# Altium PCB Clock PCB.PcbDoc
Units mm, origin at the board's own origin, x right, y up, seen from the top; angles counter-clockwise.
Board outline 80 x 80 mm, 2 copper layers (Top Layer, Bottom Layer); 36 components, 38 nets, 132 pads, 2 vias.
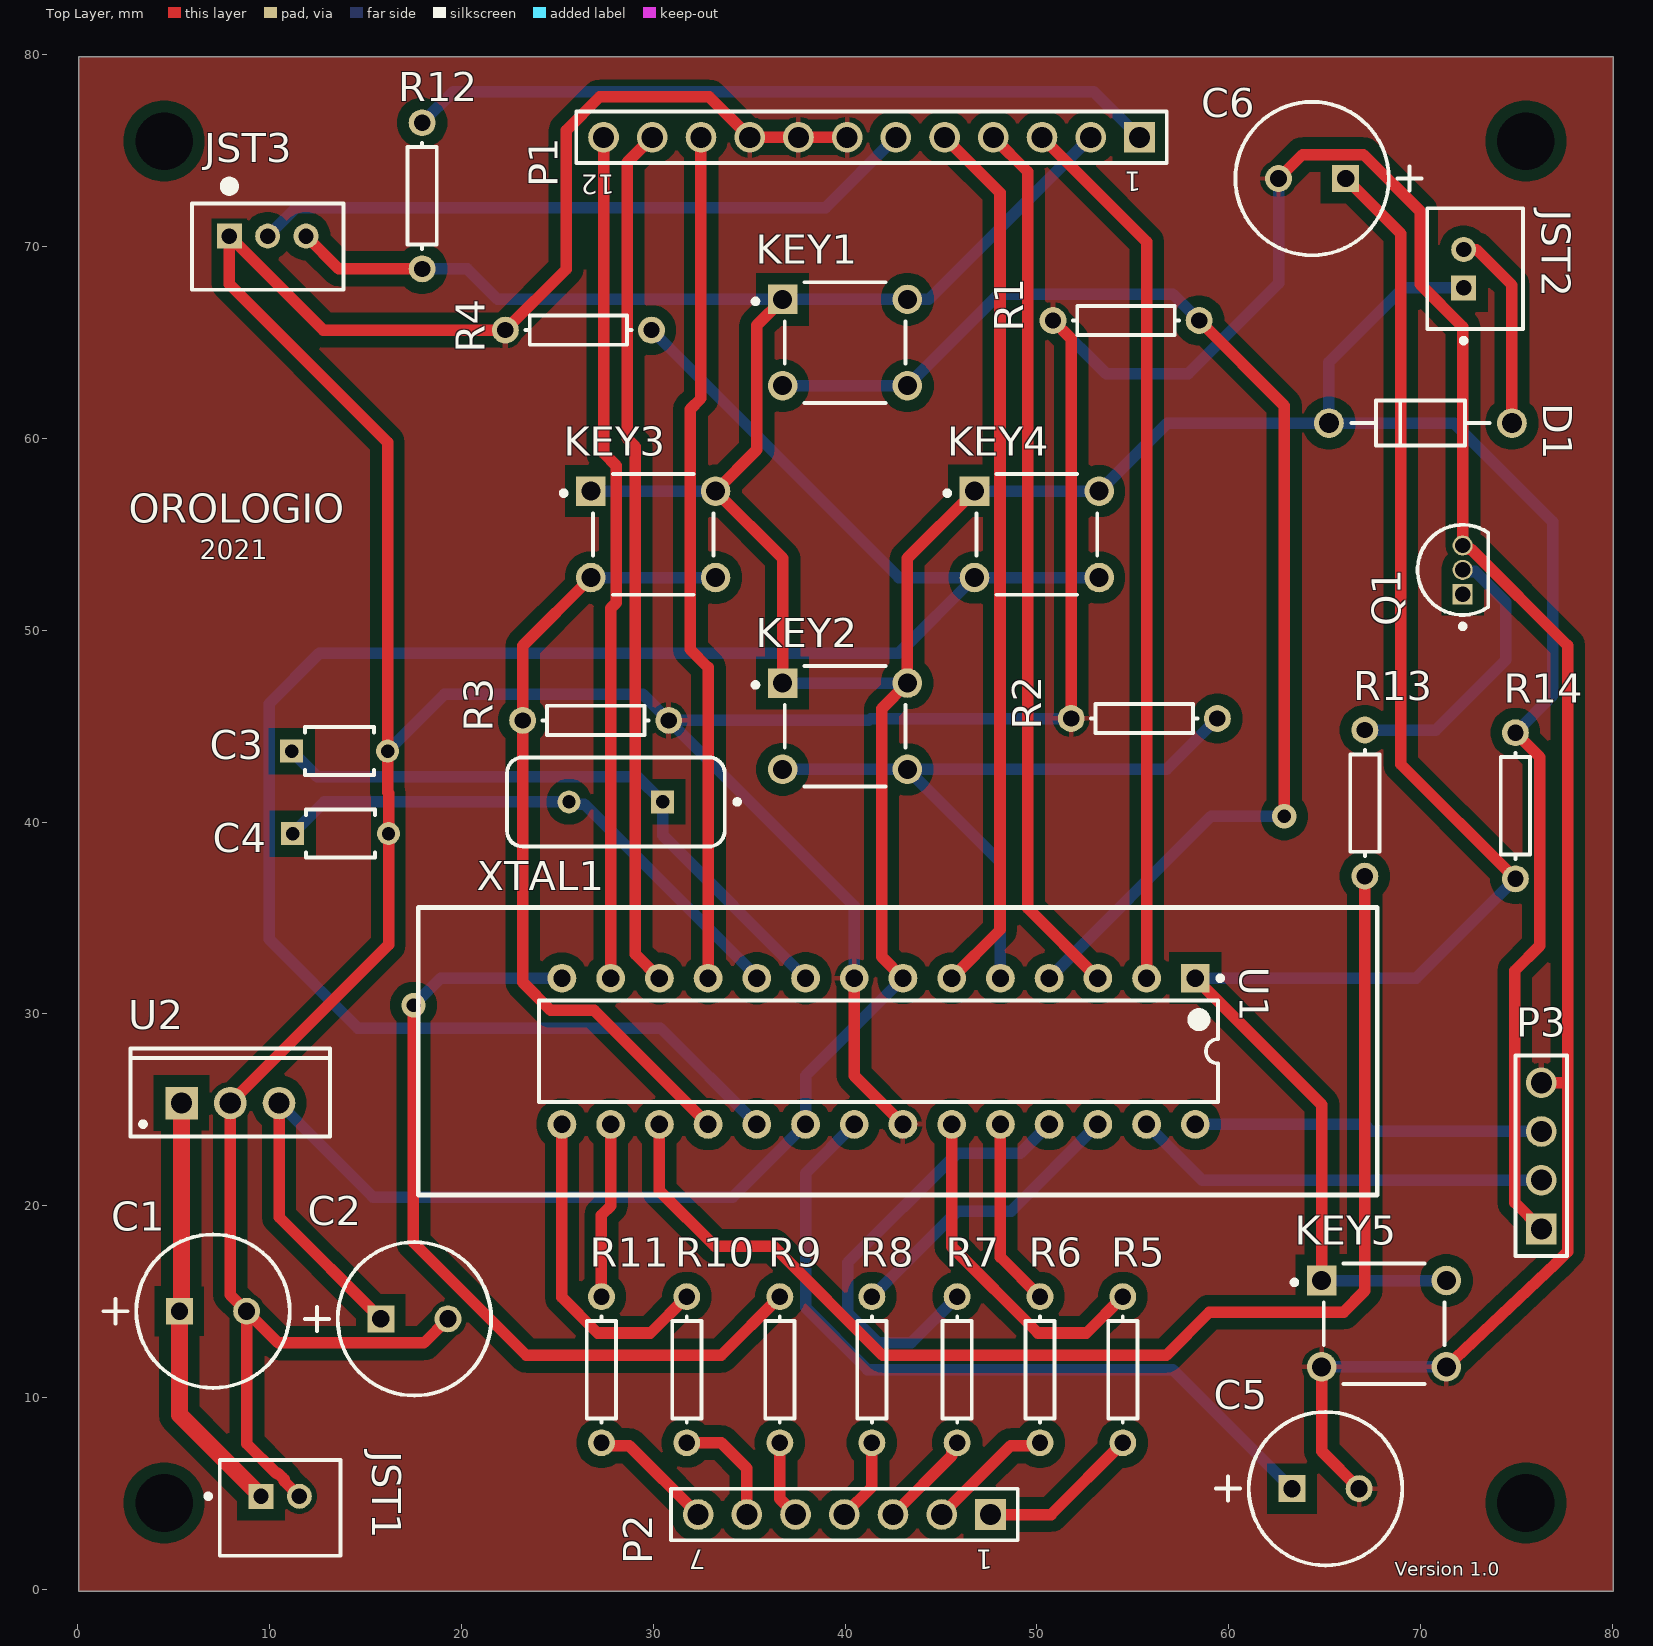
[diagram p0: Top Layer view]
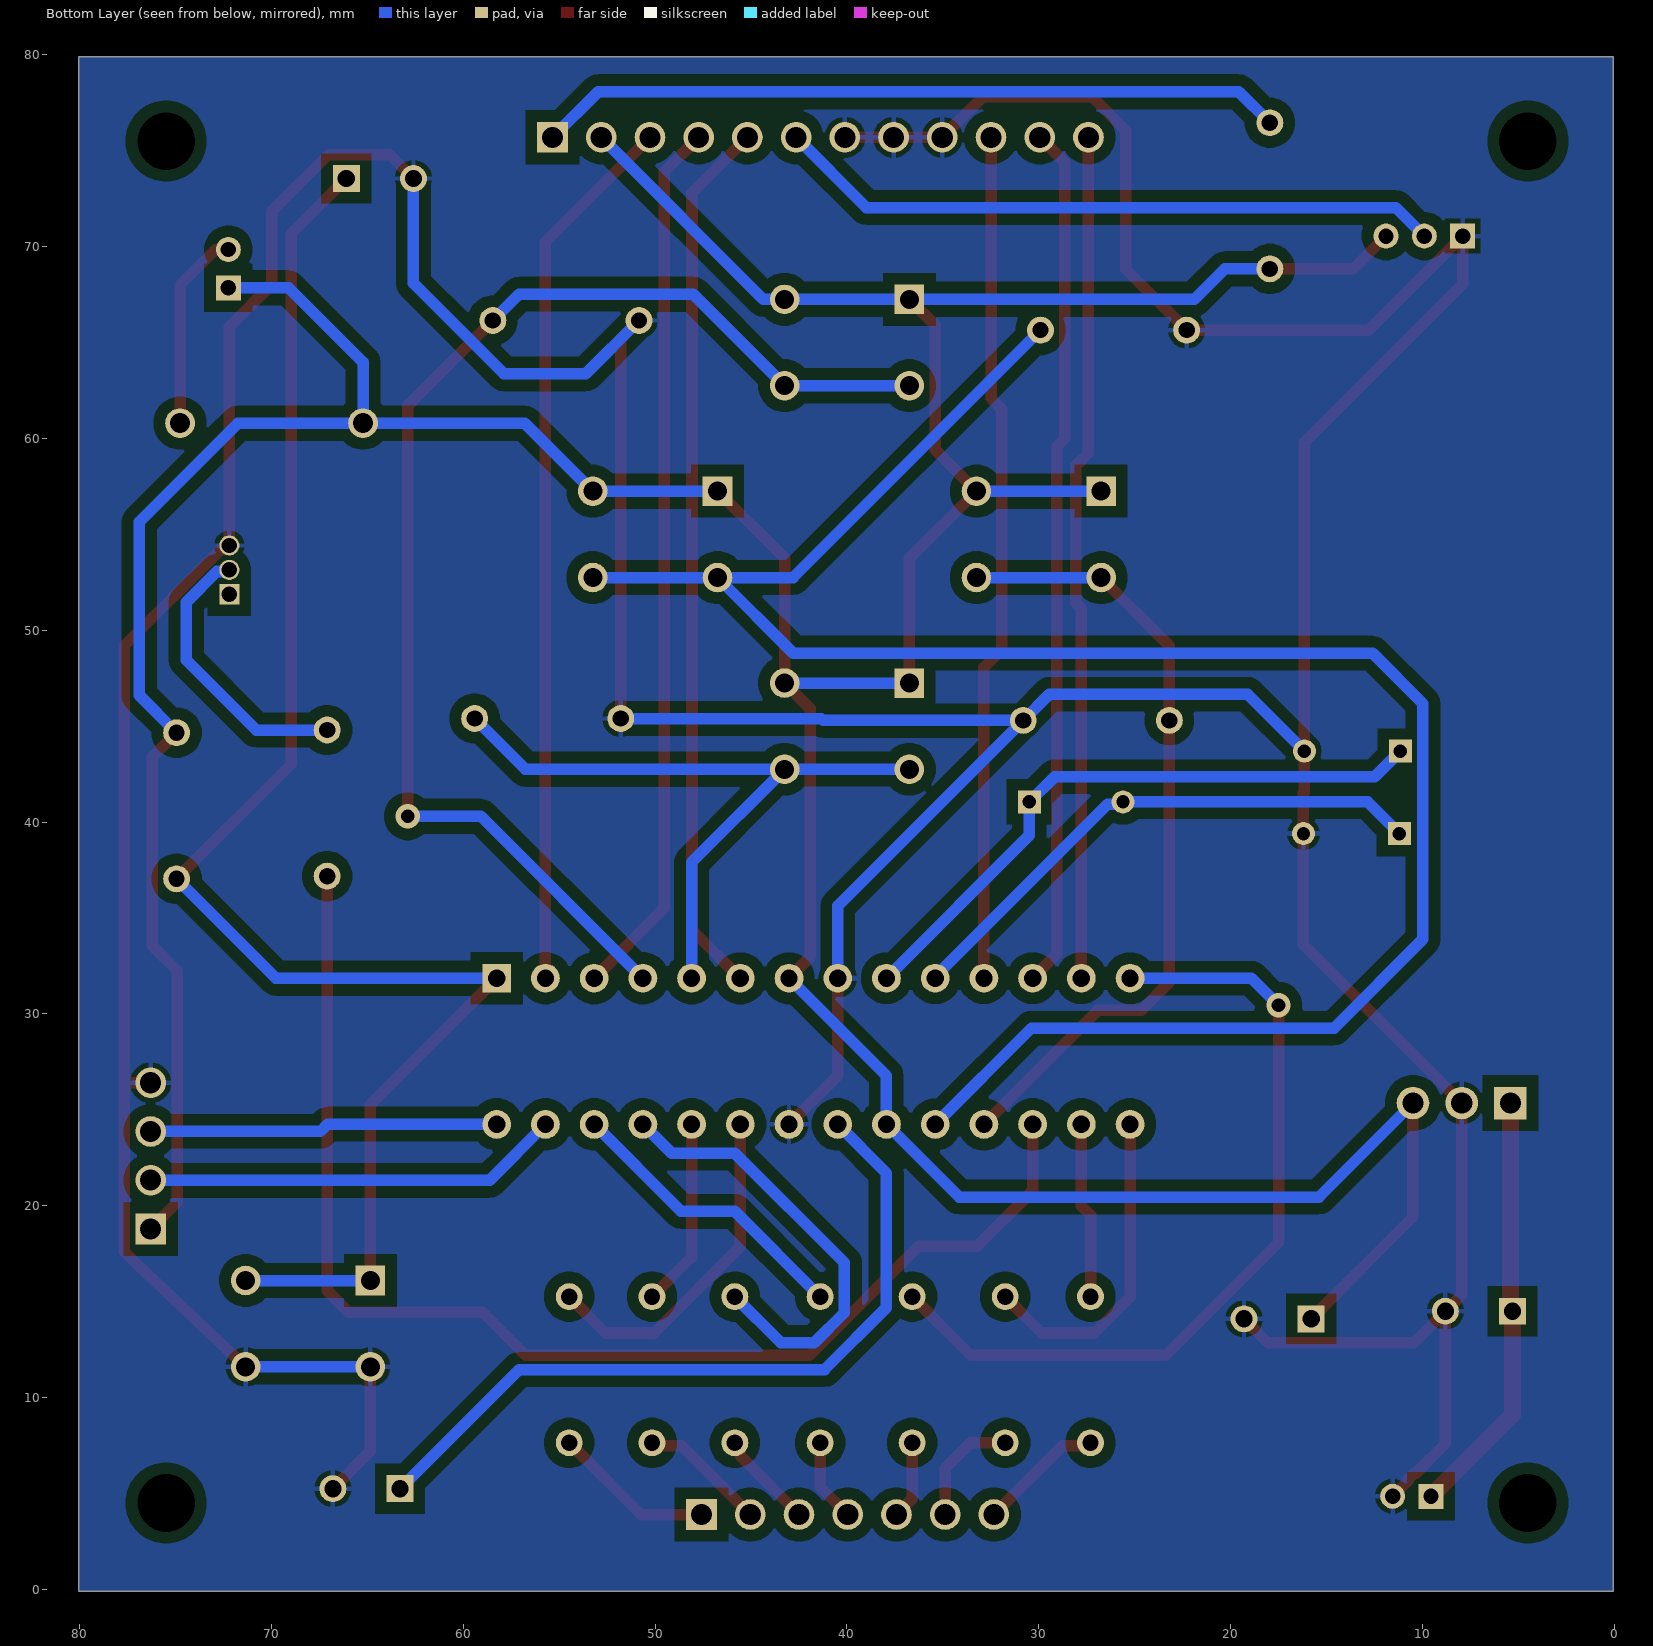
[diagram p1: Bottom Layer view, seen from below]
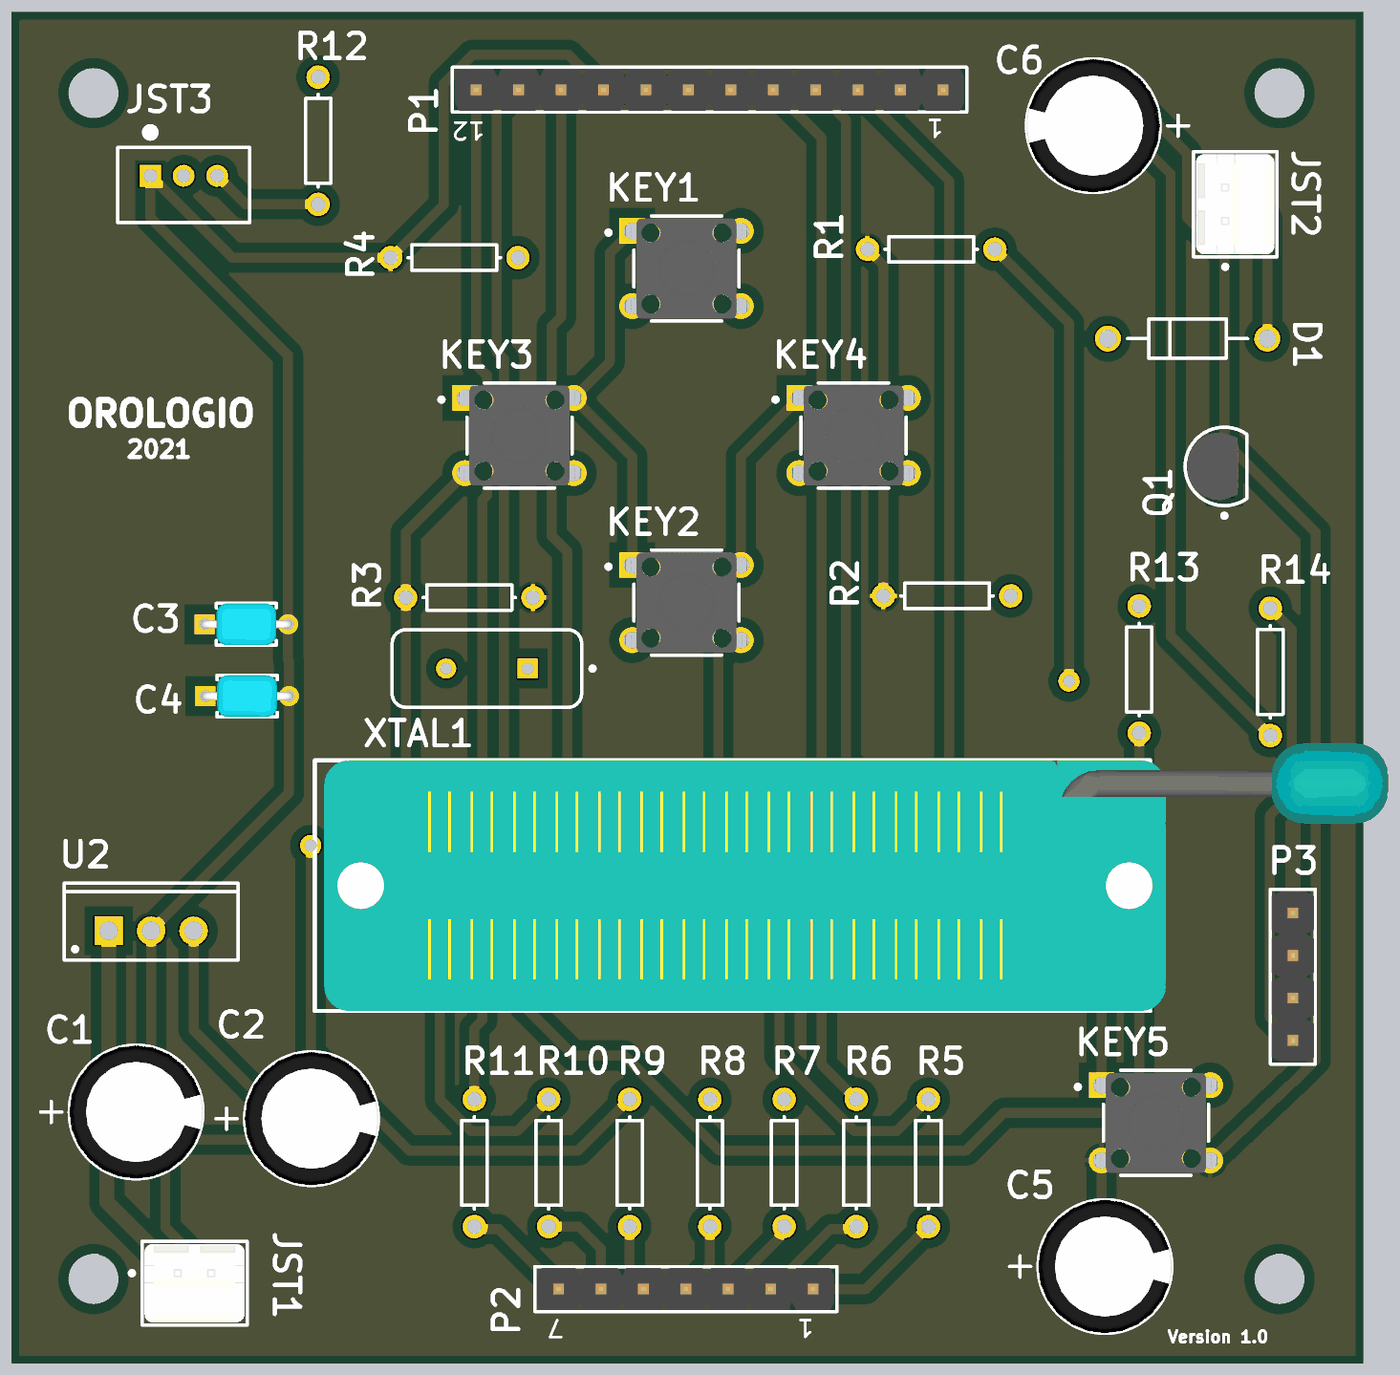
[diagram p2: 3D render of the assembled board from above, using the file's embedded part models]

## Layer stack, top to bottom
Top Solder: solder mask 0.0102, Solder Resist, Dk 3.5
Top Layer: signal copper 0.0356
Dielectric 1: dielectric 0.32, FR-4, Dk 4.8
Bottom Layer: signal copper 0.0356
Bottom Solder: solder mask 0.0102, Solder Resist, Dk 3.5

## Board outline
0.05,-0.1 80.05,-0.1 80.05,79.9 0.05,79.9

## Design rules (kind name [scope] priority, off if disabled: settings)
Clearance [All] p1: gap=0.6 ignorepadtopadclearanceinfootprint=FALSE except(0: Arc-Hole Track-Hole SMDPad-Hole THPad-Hole Via-Hole Fill-Hole Poly-Hole Region-Hole Text-Hole; 0.254: Arc-SMDPad Arc-THPad Arc-Via Arc-Text Track-SMDPad Track-THPad Track-Via Track-Text SMDPad-SMDPad SMDPad-THPad SMDPad-Via SMDPad-Text THPad-THPad THPad-Via THPad-Text Via-Via Via-Text Fill-Text Poly-Text Region-Text Text-Text; 0.4: Arc-Arc Arc-Track Track-Track)
HoleSize [All] p1: absolutevalues=TRUE maxlimit=4.5 minlimit=0.025 maxpercent=80.000 minpercent=20.000
PolygonConnect [All] p1: connectstyle=Relief reliefconductorwidth=0.254 reliefentries=4 polygonreliefangle="90 Angle" airgapwidth=0.254
RoutingVias [All] p1: holewidth=0.711 width=1.27 viastyle="Through Hole" minholewidth=0.711 minwidth=1.27 maxholewidth=0.711 maxwidth=1.27
SilkToSolderMaskClearance [IsPad] p1: minsilkscreentomaskgap=0.2 clearancetoexposedcopper=TRUE
SolderMaskExpansion [All] p1: expansion=0.102 istentingtop=FALSE
Width [All] p1: maxlimit=1 minlimit=0.254 preferedwidth=0.6
28 further rules are at their usual default settings.

## Components (designator, comment, footprint, x,y, rotation, side; value= is the part's Value field where it differs from the comment)
C1 "330nF" CAPPR65-350-1150X800X1250 7.05,14.5 r0 top
C2 "100nF" CAPPR65-350-1150X800X1250 17.55,14.1 r0 top
C3 "22pF" FP-RCE0K1-MFG 13.65,43.7 r0 top
C4 "22pF" FP-RCE0K1-MFG 13.7,39.4 r0 top
C5 "100nF" CAPPR65-350-1150X800X1250 65.05,5.25 r0 top
C6 "100nF" CAPPR65-350-1150X800X1250 64.35,73.55 r180 top
D1 "1N4001" ONSC-AXIAL_LEAD-2-59-10_P 70,60.8 r0 top
JST1 "Power" FP-440054-2-MFG 10.55,4.25 r180 top
JST2 "Buzzer" FP-440054-2-MFG 72.85,68.85 r270 top
JST3 "Potentiometer" JST-B3B-PH-K-S-3_V 9.9,70 r0 top
KEY1 "UP_BTN" FP-1825910-2-0 40,65 r0 top
KEY2 "DOWN_BTN" FP-1825910-2-0 40,45 r0 top
KEY3 "SELECT_BTN" FP-1825910-2-0 30,55 r0 top
KEY4 "BACK_BTN" FP-1825910-2-0 50,55 r0 top
KEY5 "RST_BTN" FP-1825910-2-0 68.1,13.85 r0 top
P1 "LCD Connector" 61301211121 41.38,75.7 r180 top
P2 "Keypad" 61300711121 39.96,3.9 r180 top
P3 "RTC Module" 61300411121 76.3,22.6 r90 top
Q1 "BC547B" ONSC-TO-92-3-29-11 72.2,53.15 r90 top
R1 "1K" AXIAL-0.3 54.65,66.15 r180 top
R2 "1K" AXIAL-0.3 55.6,45.4 r180 top
R3 "1K" AXIAL-0.3 27,45.3 r180 top
R4 "1K" AXIAL-0.3 26.1,65.65 r0 top
R5 "1K" AXIAL-0.3 54.482,11.45 r90 top
R6 "1K" AXIAL-0.3 50.164,11.45 r90 top
R7 "1K" AXIAL-0.3 45.846,11.45 r90 top
R8 "1K" AXIAL-0.3 41.4,11.45 r90 top
R9 "470R" AXIAL-0.3 36.6,11.45 r90 top
R10 "470R" AXIAL-0.3 31.75,11.45 r90 top
R11 "470R" AXIAL-0.3 27.3,11.45 r90 top
R12 "220R" AXIAL-0.3 17.95,72.65 r90 top
R13 "220R" AXIAL-0.3 67.1,40.99 r90 top
R14 "10K" AXIAL-0.3 74.95,40.85 r90 top
U1 "ATmega328P-PU" 28P3 41.75,28.05 r270 top
U2 "L7805ACV" TO220 7.95,25.35 r0 top
XTAL1 "16MHz" FOX-FOXSLF160-20 28.05,41.05 r180 top

## Footprints (in the part's own frame and the unit in brackets; to place one, negate y for a bottom-side part, rotate by r counter-clockwise, add the part's x,y. Pads: shape width x height; smd on the part's side, far side on the other; paste and mask are expansions set on the pad)
28P3 [mm] "28-Pin Plastic Dual In-Line Package (PDIP)"
  rect 1.5x1.5 hole 0.9: 1(-3.81,16.51)
  round 1.5 hole 0.9: 2(-3.81,13.97) 3(-3.81,11.43) 4(-3.81,8.89) 5(-3.81,6.35) 6(-3.81,3.81) 7(-3.81,1.27) 8(-3.81,-1.27) 9(-3.81,-3.81) 10(-3.81,-6.35) 11(-3.81,-8.89) 12(-3.81,-11.43) 13(-3.81,-13.97) 14(-3.81,-16.51) 15(3.81,-16.51) 16(3.81,-13.97) 17(3.81,-11.43) 18(3.81,-8.89) 19(3.81,-6.35) 20(3.81,-3.81) 21(3.81,-1.27) 22(3.81,1.27) 23(3.81,3.81) 24(3.81,6.35) 25(3.81,8.89) 26(3.81,11.43) 27(3.81,13.97) 28(3.81,16.51)
  silkscreen extent -3.93,-17.7 2.65,17.94, body extent -8.52,-23.45 7.51,40.25, height 11.45
61300411121 [mm] "Pin Header, pitch 2.54 mm, THT, Vertical, single row, 4p"
  rect 1.6x1.6 hole 1.1: 1(-3.81,0)
  round 1.6 hole 1.1: 2(-1.27,0) 3(1.27,0) 4(3.81,0)
  silkscreen extent -5.23,-1.35 5.23,1.35, body extent -5.08,-1.27 5.08,1.27, height 8.57
61300711121 [mm] "Pin Header, pitch 2.54 mm, THT, Vertical, single row, 7p"
  rect 1.6x1.6 hole 1.1: 1(-7.62,0)
  round 1.6 hole 1.1: 2(-5.08,0) 3(-2.54,0) 4(0,0) 5(2.54,0) 6(5.08,0) 7(7.62,0)
  silkscreen extent -9.04,-1.35 9.04,1.35, body extent -8.89,-1.27 8.89,1.27, height 8.57
61301211121 [mm] "Pin Header, pitch 2.54 mm, THT, Vertical, single row, 12p"
  rect 1.6x1.6 hole 1.1: 1(-13.97,0)
  round 1.6 hole 1.1: 2(-11.43,0) 3(-8.89,0) 4(-6.35,0) 5(-3.81,0) 6(-1.27,0) 7(1.27,0) 8(3.81,0) 9(6.35,0) 10(8.89,0) 11(11.43,0) 12(13.97,0)
  silkscreen extent -15.39,-1.35 15.39,1.35, body extent -15.24,-1.27 15.24,1.27, height 8.57
AXIAL-0.3 [mm] "Axial Device, Thru-Hole; 2 Leads; 0.3 in Pin Spacing"
  round 1.4 hole 0.85: 1(-3.81,0) 2(3.81,0)
  silkscreen extent -2.77,-0.76 2.77,0.76
CAPPR65-350-1150X800X1250 [mm] "THD, 2-Leads, Dia 8mm, Body 11.5mm"
  rect 1.4x1.4 hole 0.9: 1(-1.75,0)
  round 1.4 hole 0.9: 2(1.75,0)
  silkscreen extent -5.71,-4 4,4, body extent -4,-4 4,4, height 11.5
FOX-FOXSLF160-20 [mm] "THD, 2-Leads, Body 11.35x4.65mm"
  rect 1.2x1.2 hole 0.7: 1(-2.44,0)
  round 1.2 hole 0.7: 2(2.44,0)
  silkscreen extent -6.45,-2.32 5.68,2.33, body extent -5.67,-2.32 5.68,2.33, height 3.6
FP-440054-2-MFG [mm]
  rect 1.3x1.3 hole 0.8 paste-1000 mask+0: 1(1,-0.6)
  round 1.3 hole 0.8 paste-1000 mask+0: 2(-1,-0.6)
  silkscreen extent -3.15,-2.5 3.87,2.5, body extent -3.25,-2.6 3.25,2.6, height 0.25
FP-1825910-2-0 [mm]
  rect 1.54x1.54 hole 0.99 paste-1000 mask+0: 1(-3.25,2.25)
  round 1.54 hole 0.99 paste-1000 mask+0: 2(3.25,2.25) 3(-3.25,-2.25) 4(3.25,-2.25)
  silkscreen extent -4.79,-3.15 3.15,3.15, body extent -4.12,-3.24 4.12,3.24, height 0.25
FP-RCE0K1-MFG [mm]
  rect 1.2x1.2 hole 0.7 paste-1000 mask+0: 1(-2.5,0)
  round 1.2 hole 0.7 paste-1000 mask+0: 2(2.5,0)
  silkscreen extent -1.8,-1.25 1.8,1.25, body extent -3.2,-1.35 3.2,1.35, height 0.25
JST-B3B-PH-K-S-3_V [mm] "Connector, 3-Leads, Body 7.9x4.5mm, Pitch 2mm"
  rect 1.3x1.3 hole 0.8: 1(-2,0.55)
  round 1.3 hole 0.8: 2(0,0.55) 3(2,0.55)
  silkscreen extent -3.95,-2.25 3.95,3.4, body extent -3.95,-2.25 3.95,2.25, height 6
ONSC-AXIAL_LEAD-2-59-10_P [mm] "AXIAL, 2-Leads, Diameter 2.35mm"
  round 1.55 hole 1.05: 1(-4.77,0) 2(4.77,0)
  silkscreen extent -3.59,-1.18 3.59,1.17
ONSC-TO-92-3-29-11 [mm] "TO, 3-Leads, Body Dia 4.7mm, Pitch 1.27mm"
  rect 1.05x1.05 hole 0.8: 1(-1.27,0)
  round 1.05 hole 0.8: 2(0,0) 3(1.27,0)
  silkscreen extent -3.07,-1.34 2.35,2.35, body extent -2.04,-0.81 2.04,2.24, height 7
TO220 [mm] "TO, Thru-Hole, Vertical, Heatsink Mounted; 3 In-Line Leads; Pitch 2.54 mm"
  rect 1.7x1.7 hole 1.1: 1(-2.54,0)
  round 1.7 hole 1.1: 2(0,0) 3(2.54,0)
  silkscreen extent -5.2,-1.75 5.2,2.85, body extent -5.25,-1.8 5.25,2.9, height 19.7

## Part data
C1 C2 C5 C6: library part CMP-1665-00042-2, "Aluminum Electrolytic Capacitor, 100 uF, +/- 20%, 50 V, -40 to 85 degC, 2-Pin THD, RoHS, Bulk", Capacitance=100uF, Case/Package=Radial, Dielectric Material=Aluminium, Leakage Current=3uA, Manufacturer=Panasonic, Max Operating Temperature=85degC, Min Operating Temperature=-40degC, Package Description="2-Pin Radial Lead, Dia 8 mm, Height 12.5 mm", Package Quantity=200, Package Reference=CAPPR65-350-1150X800X1250, Ripple Current=250mA, Tolerance=20%, Voltage=50V, Datasheet URL=https://industrial.panasonic.com/cdbs/www-data/pdf/RDF0000/ABA0000C1218.pdf, Datasheet Version="Rev. 05, 10/2016", Diameter=8mm, Dissipation Factor=0.12%, Height=11.5mm, Height - Seated (Max)=0.492inch, Lead Diameter=0.6mm, Lead Free=LeadFree, Lead Pitch=3.5mm, Lead/Base Style=Straight, Length=11.5mm, Life (Hours)=2000Hour, Manufacturer URL=http://www.panasonic.com/, Mount=ThroughHole, Number of Pins=2, Packaging=Bulk, Polarity=Polar, Radiation Hardening=No, REACH SVHC=NoSVHC, Ripple Current (AC)=250mA, RoHSCompliant=true, Termination=Radial, Voltage Rating=50V, Voltage Rating (DC)=50V
C3 C4: library part CMP-06035-004895-1, "Cap Ceramic 22pF 50V C0G ±5% Radial 5mm +125°C Automotive Bulk", Case/Package=Radial, Dielectric=C0G, Max Operating Temperature=125°C, Min Operating Temperature=-55°C, Package Quantity=2000, Ratings=AEC-Q200, Resistor Type=Ceramic, Tolerance=5%, Voltage Rating=50V, Capacitance=22pF, Height=3.5mm, Height - Seated (Max)=0.138inch, Lead Diameter=0.5mm, Lead Pitch=0.197inch, Lead/Base Style="Formed Leads", Length=0.142inch, Mount="Through Hole", Packaging="Tape and Reel", Termination=Radial, Voltage Rating (DC)=50V, Width=0.098inch
D1: library part CMP-0902-00117-1, "Standard Recovery Rectifier, 2-Pin Axial_Lead, Pb-Free, Bulk Bag", Manufacturer="On Semiconductor", ComponentLink1Description="Manufacturer URL", ComponentLink1URL=http://www.onsemi.com/, ComponentLink2Description=Datasheet, ComponentLink2URL=http://www.onsemi.com/pub_link/Collateral/1N4001-D.PDF, ComponentLink3Description="Package Specification", ComponentLink3URL=http://www.onsemi.cn/pub_link/Collateral/59-10.PDF, DatasheetVersion="Rev. 13", IFSM Max (A)=30, IO(rec) Max (A)=1, Mounting Technology="Through Hole", PackageDescription="2-Pin, Axial Lead, Diameter 2.35 mm", PackageReference=AXIAL_LEAD-2-59-10, PackageVersion="Rev. U, 02/2005", Packing="Bulk Bag", PartNumber=1N4001, RoHS=TRUE, Type="Standard Recovery", VRRM Max (V)=50
JST1 JST2: library part CMP-03369-000005-1, "CONN HEADER VERT 2POS 2MM", Current Rating=3A, Manufacturer="TE Connectivity", Manufacturer Part Number=440054-2, Temperature="-25°C to +85°C", Temperature Range High=+85°C, Temperature Range Low=-25°C, Voltage Rating=250V, Automotive=No, Category=Conn, ComponentLink2Description=Datasheet, ComponentLink2URL=https://www.te.com/usa-en/product-440054-2.datasheet.pdf, Conn Gender=Male, Conn Orientation=Vertical, Contact Material=Tin,Nickel, Device Class L1=Connectors, Device Class L2="Headers and Wire Housings", Device Class L3=unset, Digikey Description="CONN HEADER VERT 2POS 2MM", Footprint Url=https://www.te.com/commerce/DocumentDelivery/DDEController?Action=showdoc&DocId=Customer+Drawing%7F440054%7FF6%7Fpdf%7FEnglish%7FENG_CD_440054_F6.pdf%7F440054-2, Height=6.35mm, Lead Free=Yes, Mouser Description="Headers & Wire Housings 2.0mm HDR 2pos VERT HPI", Number Of Contacts=2, Number Of Rows=1, Octopart=https://octopart.com/440054-2-te+connectivity-40237927, Package=440054-2, Pitch=2mm, RoHS=TRUE
JST3: library part CMP-2000-05164-1, "Male Header, Pitch 2 mm, 1 x 3 Position, Height 6 mm, Tail Length 3.4 mm, -25 to 85 degC, RoHS, Bulk", Manufacturer=JST, Datasheet URL=https://datasheet.ciiva.com/11746/0900766b80826550-11746939.pdf, Datasheet Version=Oct-06, Manufacturer URL=http://www.jst.com/home2.html, No of Positions=3, Pitch=2mm, Style/Orientation=StraightHeader/Plug, Termination=Crimp, Type=ShroudedHeader
KEY1 KEY2 KEY3 KEY4 KEY5: library part CMP-03407-000004-1, "SWITCH TACTILE SPST-NO 0.05A 24V", Contact Current Rating=50mA, Contact Resistance=100mΩ, Manufacturer=TE, Manufacturer Part Number=1825910-2, Operating Force=160gf, Package=0, Temperature="-35°C to +85°C", Temperature Range High=+85°C, Temperature Range Low=-35°C, Voltage Rating Dc=24V, Automotive=No, Category=Switch, ComponentLink2Description=Datasheet, ComponentLink2URL=https://www.te.com/commerce/DocumentDelivery/DDEController?Action=showdoc&DocId=Customer+Drawing%7F1825910%7FC10%7Fpdf%7FEnglish%7FENG_CD_1825910_C10.pdf%7F1825910-2, Device Class L1=Electromechanical, Device Class L2=Switches, Device Class L3="Tactile Switches", Digikey Description="SWITCH TACTILE SPST-NO 0.05A 24V", Electromechanical Life=100000Cycles, Height=4.6mm, Lead Free=Yes, Mount="Through Hole", Octopart=https://octopart.com/1825910-2-te+connectivity-42270502, RoHS=TRUE, Throw Configuration=SPST-NO
P1: library part CMP-1502-01086-1, "THT Vertical Pin Header WR-PHD, Pitch 2.54 mm, Single Row, 12 pins", Contact Resistance=20mOhm, Manufacturer="Wurth Elektronik", Operating Temperature=-40to105degC, Package Reference=61301211121, Rated Current=3A, Withstanding Voltage=500VAC, Working Voltage=250VAC, Datasheet URL=https://katalog.we-online.de/em/datasheet/6130xx11121.pdf, Gender=Male, Manufacturer URL=http://www.we-online.de, Mounting Technology=THT, Orientation=Vertical, Packaging=Bag, Part Number=61301211121, Pin Number=12, Pitch=2.54mm, Publisher=WurthElektronik, Row Number=Single
P2: library part CMP-1502-01074-1, "THT Vertical Pin Header WR-PHD, Pitch 2.54 mm, Single Row, 7 pins", Contact Resistance=20mOhm, Manufacturer="Wurth Elektronik", Operating Temperature=-40to105degC, Package Reference=61300711121, Rated Current=3A, Withstanding Voltage=500VAC, Working Voltage=250VAC, Datasheet URL=https://katalog.we-online.de/em/datasheet/6130xx11121.pdf, Gender=Male, Manufacturer URL=http://www.we-online.de, Mounting Technology=THT, Orientation=Vertical, Packaging=Bag, Part Number=61300711121, Pin Number=7, Pitch=2.54mm, Publisher=WurthElektronik, Row Number=Single
P3: library part CMP-1502-01064-1, "THT Vertical Pin Header WR-PHD, Pitch 2.54 mm, Single Row, 4 pins", Contact Resistance=20mOhm, Manufacturer="Wurth Elektronik", Operating Temperature=-40to105degC, Package Reference=61300411121, Rated Current=3A, Withstanding Voltage=500VAC, Working Voltage=250VAC, Datasheet URL=https://katalog.we-online.de/em/datasheet/6130xx11121.pdf, Gender=Male, Manufacturer URL=http://www.we-online.de, Mounting Technology=THT, Orientation=Vertical, Packaging=Bag, Part Number=61300411121, Pin Number=4, Pitch=2.54mm, Publisher=WurthElektronik, Row Number=Single
Q1: library part NPN, "NPN Bipolar Transistor", Code_JEDEC=TO-226-AA, LatestRevisionDate=17-Jul-2002, LatestRevisionNote="Re-released for DXP Platform.", PackageDescription="TO, Flat Index; 3 In-Line, Axial Leads; Body Dia. 4.8mm; Leads 0.55 x 0.51 mm (max)", PackageReference=TO-226-AA, Published=8-Jun-2000, Publisher="Altium Limited"
R1 R2 R3 R4 R5 R6 R7 R8 R9 R10 R11 R12 R13 R14: library part Res1, "Resistor", LatestRevisionDate=17-Jul-2002, LatestRevisionNote="Re-released for DXP Platform.", PackageDescription="Axial Device, Thru-Hole; 2 Leads; 0.3 in Pin Spacing", PackageReference=AXIAL-0.3, Published=8-Jun-2000, Publisher="Altium Limited"
U1: library part CMP-0095-00013-2, "8-bit AVR Microcontroller, 32KB Flash, 1KB EEPROM, 2KB SRAM, 28-pin PDIP, Industrial Grade (-40°C to 85°C)", ComponentLink1Description="Manufacturer URL", ComponentLink1URL=http://www.atmel.com/, ComponentLink2Description="ATmega48A/48PA/88A/88PA/168A/168PA/328/328P Datasheet", ComponentLink2URL=http://www.atmel.com/dyn/resources/prod_documents/8271.pdf, ComponentLink3Description="ATmega48A/48PA/88A/88PA/168A/168PA/328/328P Summary", ComponentLink3URL=http://www.atmel.com/dyn/resources/prod_documents/8271S.pdf, DatasheetVersion="revD, May-2011", PackageDescription="28-lead (0.300\"/7.62mm Wide) Plastic Dual Inline Package (PDIP)", PackageReference=28P3, PackageVersion="revB, Sep-2001", RevisionNote="DatasheetVersion updated. URLs added."
U2: library part CMP-0244-00484-1, "Positive Voltage Regulator, 5V, 3-Pin TO-220", ComponentLink1Description="Manufacturer URL", ComponentLink1URL=http://www.st.com, ComponentLink2Description=Datasheet, ComponentLink2URL=http://www.st.com/internet/com/TECHNICAL_RESOURCES/TECHNICAL_LITERATURE/DATASHEET/CD00000444.pdf, ComponentLink3Description="Package Specification", ComponentLink3URL=http://www.st.com/internet/com/TECHNICAL_RESOURCES/TECHNICAL_LITERATURE/PACKAGE_INFORMATION/CD00004649.pdf, DatasheetVersion=16/11/2011, PackageDescription="TO, Thru-Hole, Vertical, Heatsink Mounted; 3 In-Line Leads; Pitch 2.54 mm", PackageReference=TO220, PackageVersion=ver3.0
XTAL1: library part CMP-1749-00003-1, "Resistance Weld Thru-Hole Crystal, 16 MHz, -20 to 70 degC, 2-Pin THD, RoHS, Bulk", Case\Package=Axial, Max Operating Temperature="155 degC", Min Operating Temperature="-55 degC", Package Quantity=200, Power Rating="250 mW", Resistance="221 kohm", Tolerance=1%, Voltage Rating="250 V", ComponentLink1Description="Manufacturer URL", ComponentLink1URL=http://www.foxonline.com/, ComponentLink2Description=Datasheet, ComponentLink2URL=http://www.foxonline.com/pdfs/hc49slf.pdf, DatasheetVersion=Mar-15, Length="0.248 inch", Mount="Through Hole", PackageDescription="2-Pin Through Hole Device, Body 11.35 x 4.65 mm", PackageReference=FOXSLF160-20, Packaging=Bulk, RoHSCompliant=true

## Free pads (board coordinates)
  round 0 / inner round 1.6 / far side round 0 hole 3 unplated: 1(4.5,75.5)
  round 0 hole 3 unplated: 2(75.5,75.5) 4(75.5,4.5)
  round 0 / inner oval 0.55x1.6 / far side round 0 hole 3 unplated: 3(4.5,4.5)

## Via types
v1: diameter 1.27, hole 0.711, Top Layer to Bottom Layer, 2 vias

## Nets (pads, with @x,y where several pads share a name; then routed paths per layer and width w, separated by ;. In a path a pad name is that pad's centre, name@x,y a point inside that pad or via, vN(x,y) a via of type N, cw(c..) or ccw(c..) an arc to the next point about the centre after c; other vN are vias at no path point)
5V0: C2.1 D1.1 JST2.1 JST3.3 KEY1.1 KEY1.2 KEY2.1 KEY2.2 KEY3.1 KEY3.2 KEY4.1 KEY4.2 P1.2 P3.1 R12.1 R14.2 U1.7 U1.20 U2.3 | length 248.6
  Top Layer w0.6: U2.3 10.49,19.41 C2.1 ; JST3.3 13.61,68.84 R12.1 ; KEY2.1 36.75,53.75 KEY3.2 35.404,59.404 35.404,65.904 KEY1.1 ; U1.7 41.907,32.973 41.907,45.907 KEY2.2 43.25,53.75 KEY4.1 ; R14.2 76.222,43.388 76.222,33.556 74.927,32.261 74.927,20.163 P3.1
  Bottom Layer w0.6: U2.3 15.39,20.45 34.15,20.45 U1.20 37.94,26.78 U1.7 ; R12.1 20.31,68.84 21.9,67.25 KEY1.1 KEY1.2 44.36,67.25 P1.2 ; KEY3.1 KEY3.2 ; KEY2.1 KEY2.2 ; KEY4.1 KEY4.2 56.8,60.8 D1.1 ; JST2.1 69.11,67.85 65.23,63.97 D1.1 ; R14.2 76.9,46.61 76.9,55.65 71.75,60.8 D1.1
Back: KEY4.3 KEY4.4 R4.2 U1.19 | length 109.9
  Bottom Layer w0.6: R4.2 42.81,52.75 KEY4.3 ; U1.19 30.376,29.264 14.602,29.264 9.979,33.886 9.979,46.18 12.595,48.796 42.796,48.796 KEY4.3 ; KEY4.4 KEY4.3
Buzzer: R13.1 U1.17 | length 66.8
  Top Layer w0.6: U1.17 30.32,20.78 33.216,17.884 36.268,17.884 41.957,12.195 56.74,12.195 59.001,14.455 65.995,14.455 67.1,15.56 R13.1
Col1: R9.2 U1.14 | length 43.5
  Top Layer w0.6: v1(17.5,30.453) 17.5,18.085 23.39,12.195 33.535,12.195 R9.2
  Bottom Layer w0.6: v1(17.5,30.453) 17.503,30.453 18.91,31.86 U1.14
Col2: R10.2 U1.15 | length 17.1
  Top Layer w0.6: U1.15 25.24,15.222 27.098,13.363 29.853,13.363 R10.2
Col3: R11.2 U1.16 | length 9.2
  Top Layer w0.6: R11.2 27.3,19.51 27.78,19.99 U1.16
D4: P1.5 U1.6 | length 46.1
  Top Layer w0.6: P1.5 48.079,72.811 48.079,34.379 U1.6
D5: P1.10 U1.11 | length 44.5
  Top Layer w0.6: P1.10 32.49,62.087 31.924,61.522 31.924,48.999 32.86,48.064 U1.11
D6: P1.11 U1.12 | length 45.1
  Top Layer w0.6: P1.11 28.648,74.398 28.648,60 29.074,59.574 29.074,33.106 U1.12
D7: P1.12 U1.13 | length 44.2
  Top Layer w0.6: P1.12 27.41,59.239 28.074,58.575 28.074,51.438 27.78,51.144 U1.13
Down: KEY2.3 KEY2.4 R2.1 U1.5 | length 36.7
  Bottom Layer w0.6: KEY2.3 KEY2.4 ; U1.5 48.1,37.9 KEY2.4 ; R2.1 56.76,42.75 KEY2.4
EN: P1.4 U1.3 | length 46.1
  Top Layer w0.6: P1.4 49.536,73.894 49.536,35.504 U1.3
GND: C1.2 C2.2 C3.2 C4.2 C5.2 C6.2 JST1.2 JST3.1 KEY5.3 KEY5.4 P1.7 P1.8 P1.9 P3.4 Q1.3 R1.2 R2.2 R3.1 R4.1 U1.8 U1.22 U2.2 | length 325.7
  Top Layer w0.6: JST1.2 10.754,5.646 10.754,5.729 10.673,5.811 10.429,6.054 10.346,6.054 8.8,7.6 C1.2 ; C2.2 18.046,12.846 10.454,12.846 C1.2 ; P1.7 P1.8 P1.9 32.927,77.803 27.2,77.803 25.473,76.076 25.473,68.833 R4.1 12.8,65.65 JST3.1 7.9,68.05 16.15,59.8 C3.2 16.15,41.556 16.2,41.506 C4.2 16.2,33.6 U2.2 7.95,15.35 C1.2 ; U1.8 40.48,26.78 U1.22 ; R1.2 51.79,65.2 R2.2 ; C6.2 63.854,74.804 67.029,74.804 69.983,71.85 69.983,68.034 72.2,65.817 Q1.3 72.322,54.42 72.513,54.229 72.647,54.229 77.67,49.206 77.67,26.41 ; KEY5.3 64.85,7.2 C5.2 ; KEY5.4 77.035,16.97 77.67,17.605 77.67,26.41 ; P3.4 77.67,26.41
  Bottom Layer w0.6: C3.2 19.113,46.663 29.447,46.663 R3.1 ; U1.8 40.48,35.63 R3.1 ; R1.2 53.614,63.376 57.883,63.376 62.6,68.093 C6.2 ; R2.2 41.346,45.4 41.246,45.3 R3.1 ; KEY5.3 KEY5.4
NetC5_1: C5.1 U1.21 | length 39.9
  Bottom Layer w0.6: U1.21 37.944,21.704 37.944,14.684 41.17,11.458 57.092,11.458 C5.1
NetC6_1: C6.1 KEY5.1 KEY5.2 R14.1 U1.1 | length 84
  Top Layer w0.6: U1.1 64.85,25.27 KEY5.1 ; C6.1 68.983,70.667 68.983,43.007 R14.1
  Bottom Layer w0.6: U1.1 69.77,31.86 R14.1 ; KEY5.1 KEY5.2
NetD1_2: D1.2 JST2.2 | length 10.5
  Top Layer w0.6: JST2.2 72.92,69.85 74.77,68 D1.2
NetJST3_2: JST3.2 P1.6 | length 34.9
  Bottom Layer w0.6: JST3.2 11.387,72.037 38.987,72.037 P1.6
NetP1_1: P1.1 R12.2 | length 39.1
  Bottom Layer w0.6: R12.2 19.572,78.082 52.968,78.082 P1.1
NetP2_1: P2.1 R5.1 | length 8.5
  Top Layer w0.6: P2.1 50.742,3.9 R5.1
NetP2_2: P2.2 R6.1 | length 6.7
  Top Layer w0.6: P2.2 48.627,7.487 50.011,7.487 R6.1
NetP2_3: P2.3 R7.1 | length 5.3
  Top Layer w0.6: P2.3 45.564,6.964 45.564,7.64 R7.1
NetP2_4: P2.4 R8.1 | length 4.3
  Top Layer w0.6: P2.4 41.4,5.34 R8.1
NetP2_5: P2.5 R9.1 | length 4.1
  Top Layer w0.6: R9.1 36.6,4.72 P2.5
NetP2_6: P2.6 R10.1 | length 6.1
  Top Layer w0.6: R10.1 33.55,7.64 34.88,6.31 P2.6
NetP2_7: P2.7 R11.1 | length 6.6
  Top Layer w0.6: R11.1 27.453,7.487 28.753,7.487 P2.7
NetQ1_2: Q1.2 R13.2 | length 14.8
  Bottom Layer w0.6: R13.2 70.8,44.8 74.45,48.45 74.45,51.463 72.85,53.064 72.286,53.064 Q1.2
Row1: R5.2 U1.23 | length 17.9
  Top Layer w0.6: U1.23 45.56,17.863 50.06,13.363 52.585,13.363 R5.2
Row2: R6.2 U1.24 | length 9.8
  Top Layer w0.6: U1.24 48.1,17.324 R6.2
Row3: R7.2 U1.25 | length 23.5
  Bottom Layer w0.6: R7.2 43.441,12.855 41.703,12.855 40.129,14.43 40.129,17.021 45.844,22.736 49.136,22.736 U1.25
Row4: R8.2 U1.26 | length 15.5
  Bottom Layer w0.6: R8.2 45.853,19.713 48.653,19.713 U1.26
RS: P1.3 U1.2 | length 46.1
  Top Layer w0.6: P1.3 55.72,70.25 U1.2
SCL: P3.3 U1.28 | length 18.2
  Bottom Layer w0.6: U1.28 67.078,24.24 67.448,23.87 P3.3
SDA: P3.2 U1.27 | length 21.8
  Bottom Layer w0.6: U1.27 58.63,21.33 P3.2
Select: KEY3.3 KEY3.4 R3.2 U1.18 | length 41.8
  Top Layer w0.6: KEY3.3 23.19,49.19 R3.2 23.19,31.648 24.66,30.178 26.922,30.178 U1.18
  Bottom Layer w0.6: KEY3.3 KEY3.4
Up: KEY1.3 KEY1.4 R1.1 U1.4 | length 67.7
  Top Layer w0.6: R1.1 62.9,61.71 v1(62.9,40.3)
  Bottom Layer w0.6: KEY1.3 KEY1.4 48.016,67.516 57.094,67.516 R1.1 ; U1.4 59.08,40.3 v1(62.9,40.3)
VCC: C1.1 JST1.1 U2.1 | length 22.3
  Top Layer w0.9: U2.1 5.41,14.61 C1.1 5.3,9.1 JST1.1
Xtal1: C3.1 U1.9 XTAL1.1 | length 32.7
  Bottom Layer w0.6: C3.1 12.48,42.37 29.17,42.37 XTAL1.1 30.49,39.31 U1.9
Xtal2: C4.1 U1.10 XTAL1.2 | length 28.7
  Bottom Layer w0.6: C4.1 12.85,41.05 XTAL1.2 25.725,40.935 26.415,40.935 35.4,31.95 U1.10
pads on no net: Q1.1

## Polygon pours and split planes (outlines as drawn)
GND on Bottom Layer "GND_L02_P001" (solid, pour order 1): 0.05,79.9 80.05,79.9 80.05,-0.1 0.05,-0.1
GND on Top Layer "GND_L01_P000" (solid, pour order 0): 0.05,79.9 80.05,79.9 80.05,-0.1 0.05,-0.1

## Silkscreen, mask and mechanical layers (free items; w line width, h text height)
Top Overlay:
  lines w0.254: 17.75,20.55 67.75,20.55 67.75,35.55 17.75,35.55 17.75,20.55
  text "OROLOGIO" at 2.65,55.6 h1.5
  text "2021" at 6.354,53.704 h1
  text "Version 1.0" at 68.654,0.704 h0.7
Board Shape:
  lines w0.9: 80.05,-0.1 0.05,-0.1 0.05,79.9 80.05,79.9 80.05,-0.1 ; 80.05,-0.1 80.05,-0.1

## Text inside footprints (layer, text, board x,y; h text height)
P1: Top Overlay "12" at 28,73.75 h1.02 r180; Top Overlay "1" at 55.45,73.9 h1.02 r180
P2: Top Overlay "1" at 47.7,2.05 h1.02 r180; Top Overlay "7" at 32.75,2.05 h1.02 r180